# Altium PCB lora1280m.PcbDoc
Units mm, origin at the board's own origin, x right, y up, seen from the top; angles counter-clockwise.
Board outline 50 x 57 mm, 2 copper layers (Top Layer, Bottom Layer); 15 components, 18 nets, 64 pads, 72 vias.
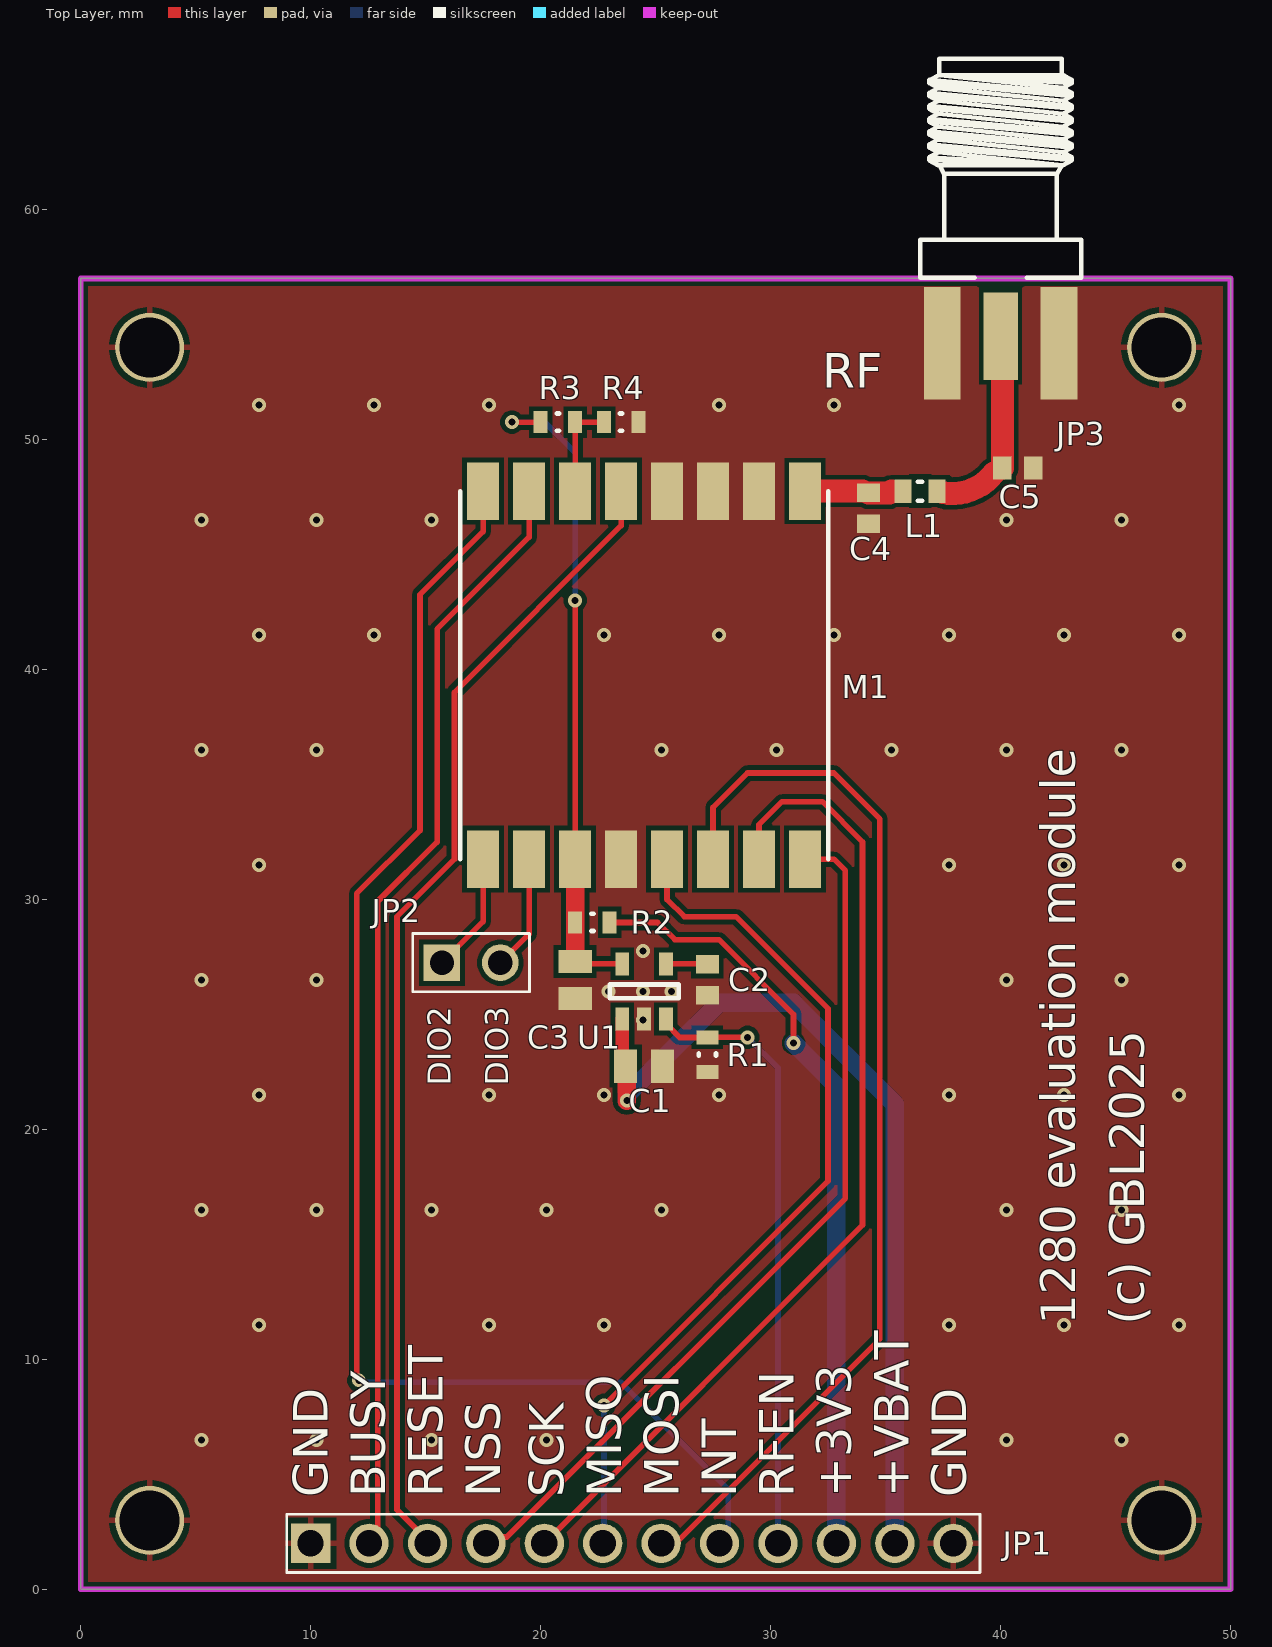
[diagram p0: Top Layer view]
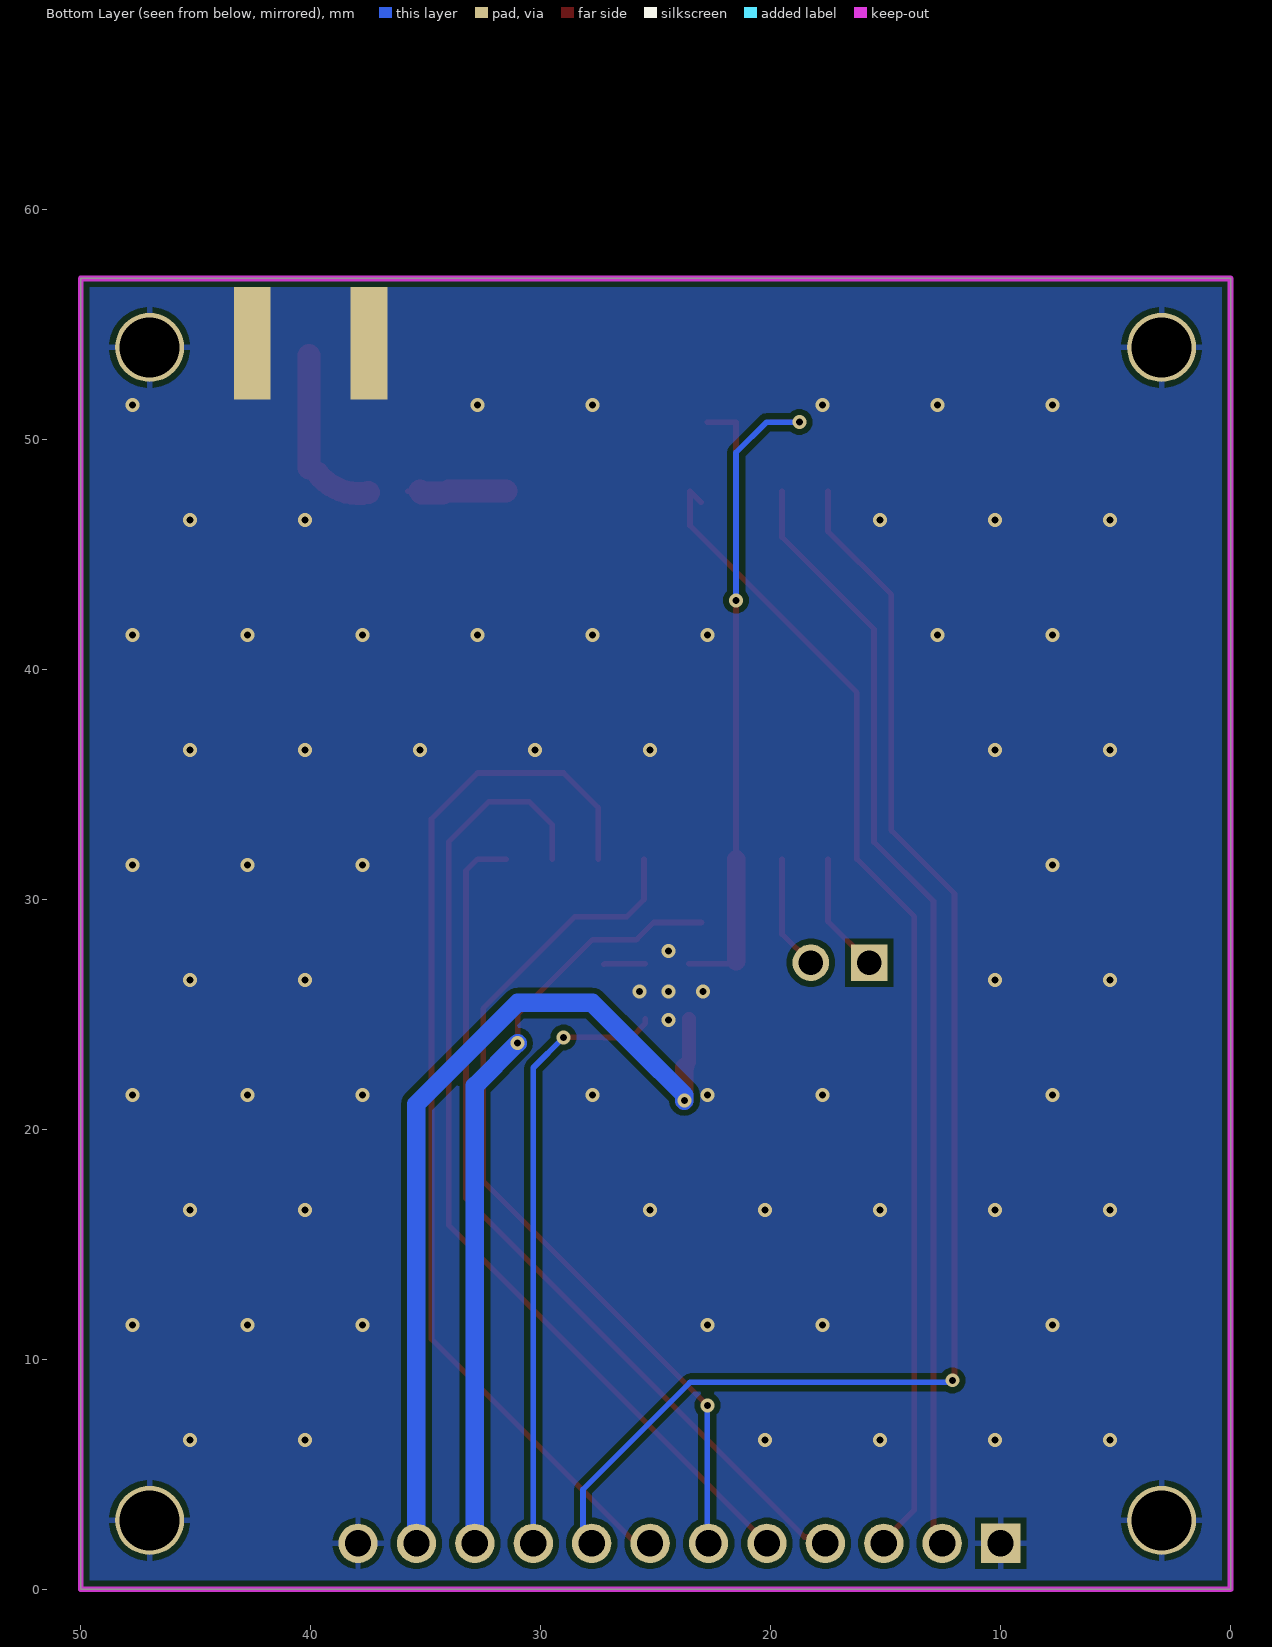
[diagram p1: Bottom Layer view, seen from below]
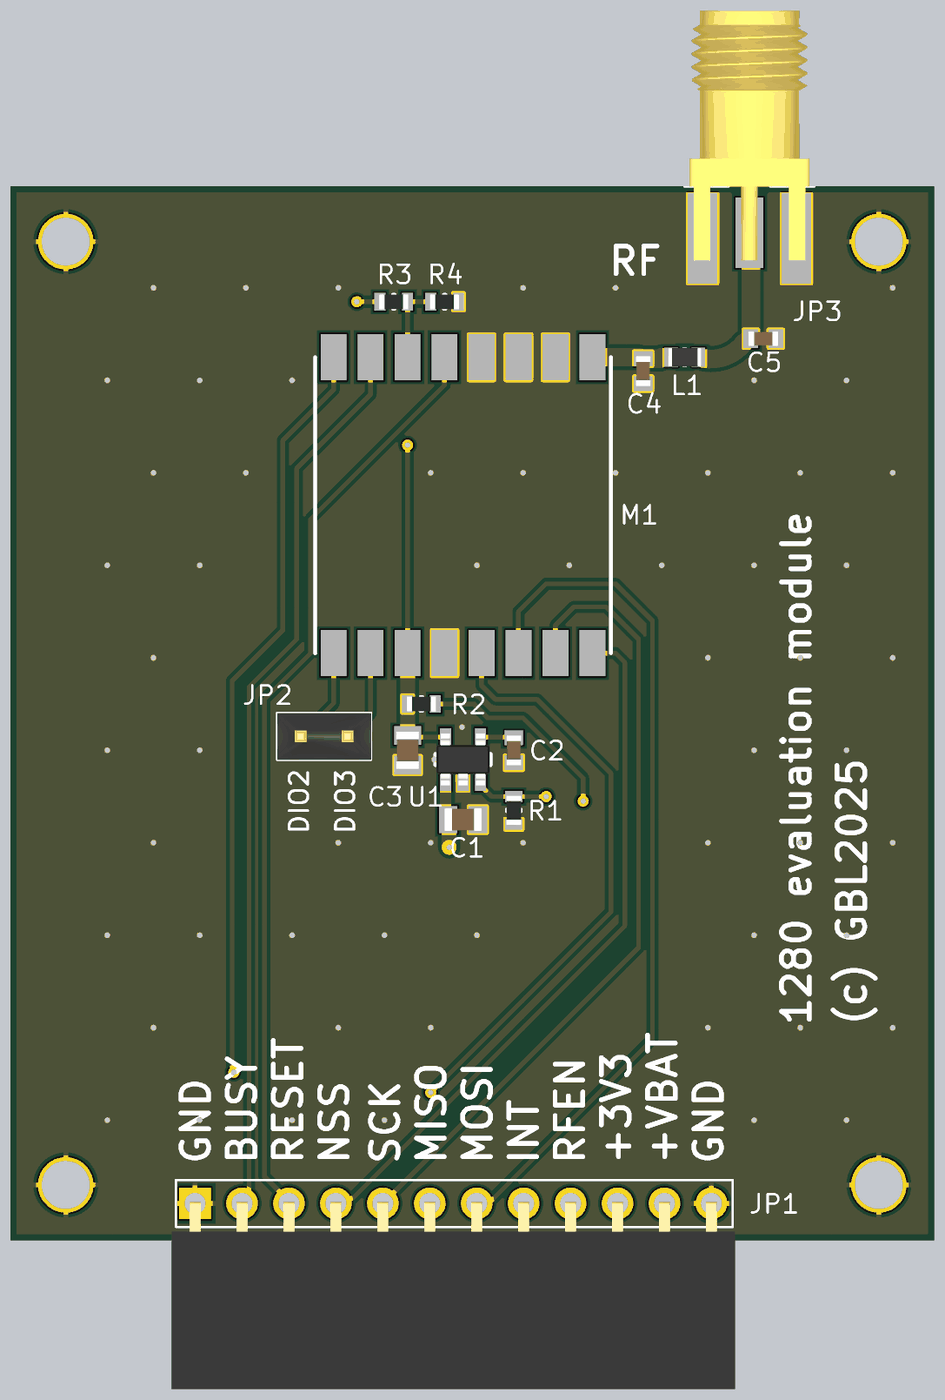
[diagram p2: 3D render of the assembled board from above, using the file's embedded part models]

## Layer stack, top to bottom
Top Solder: solder mask 0.0102, Solder Resist, Dk 3.5
Top Layer: signal copper 0.0356
Dielectric 1: dielectric 0.32, FR-4, Dk 4.8
Bottom Layer: signal copper 0.0356
Bottom Solder: solder mask 0.0102, Solder Resist, Dk 3.5

## Board outline
0,0 50,0 50,57 0,57

## Design rules (kind name [scope] priority, off if disabled: settings)
Clearance [All] p1: gap=0.2 ignorepadtopadclearanceinfootprint=FALSE
HoleSize [All] p1: absolutevalues=TRUE maxlimit=5 minlimit=0.025 maxpercent=80.000 minpercent=20.000
MinimumSolderMaskSliver [All] p1: minsoldermaskwidth=0.1
PolygonConnect PolygonConnect_1 [All vs IsNamedPolygon('GND_L01_P001') Or IsNamedPolygon('GND_L02_P000')] p1: thpad.connectstyle=Relief thpad.reliefconductorwidth=0.254 thpad.reliefentries=4 thpad.polygonreliefangle="90 Angle" thpad.airgapwidth=0.254 smdpad.connectstyle=Direct smdpad.reliefconductorwidth=0.254 smdpad.reliefentries=4 smdpad.polygonreliefangle="90 Angle" smdpad.airgapwidth=0.254 via.connectstyle=Direct via.reliefconductorwidth=0.254 via.reliefentries=4 via.polygonreliefangle="90 Angle" via.airgapwidth=0.254
PolygonConnect [All] p2: connectstyle=Relief reliefconductorwidth=0.254 reliefentries=4 polygonreliefangle="90 Angle" airgapwidth=0.254
RoutingVias [All] p1: holewidth=0.711 width=1.27 viastyle="Through Hole" minholewidth=0.711 minwidth=1.27 maxholewidth=0.711 maxwidth=1.27
SilkToSilkClearance [All] p1: silktosilkclearance=0.1
SilkToSolderMaskClearance [IsPad] p1: minsilkscreentomaskgap=0.1 clearancetoexposedcopper=TRUE
SolderMaskExpansion [All] p1: expansion=0.102 istentingtop=FALSE
Width [All] p1: maxlimit=2 minlimit=0.2 preferedwidth=0.25
26 further rules are at their usual default settings.

## Components (designator, comment, footprint, x,y, rotation, side; value= is the part's Value field where it differs from the comment)
C1 "CAPN" C-0805 24.5,22.75 r0 top
C2 "CAPN" C-0603 27.25,26.5 r270 top
C3 "CAPN" C-0805 21.5,26.5 r270 top
C4 "CAPN" C-0603 34.25,47 r270 top
C5 "CAPN" C-0603 40.75,48.75 r0 top
JP1 "CON12" PBS1-12R 10,2 r0 top locked
JP2 "HEADER 2" PLS1-2 15.71,27.25 r0 top
JP3 "EM-SA071-GGT" SMA_F_EDGE 40,55.75 r270 top
L1 "L" L-0603 36.5,47.75 r0 top
M1 "LORA1280" LGA16_LORA1280 24.5,39.75 r90 top
R1 "RES" R-0603 27.25,23.25 r90 top
R2 "RES" R-0603 22.25,29 r0 top
R3 "RES" R-0603 20.75,50.75 r0 top
R4 "RES" R-0603 23.5,50.75 r180 top
U1 "LP5907MFX-3.0" SOT-23-5 24.5,26 r90 top

## Footprints (in the part's own frame and the unit in brackets; to place one, negate y for a bottom-side part, rotate by r counter-clockwise, add the part's x,y. Pads: shape width x height; smd on the part's side, far side on the other; paste and mask are expansions set on the pad)
C-0603 [mm] "Chip Capacitor, 2-Leads, Body 1,60x0,80mm, IPC Medium Density"
  rect 0.8x1 smd: 1(-0.675,0) 2(0.675,0)
  body extent -0.8,-0.4 0.8,0.4, height 0.8
C-0805 [mm] "Chip Capacitor, 2-Leads, Body 2,00x1,25mm, IPC Medium Density"
  rect 1x1.45 smd: 1(-0.8,0) 2(0.8,0)
  body extent -1,-0.62 1,0.63, height 1.25
L-0603 [mm] "Chip Inductor, 2-Leads, Body 1,60x0,80mm, IPC Medium Density"
  rect 0.74x1.02 smd: 1(-0.735,0) 2(0.735,0)
  silkscreen extent -0.1,-0.41 0.1,0.41, body extent -0.9,-0.5 0.9,0.5, height 1
LGA16_LORA1280 [mm]
  rect 2.5x1.4 smd: 1(-8,7) 2(-8,5) 3(-8,3) 4(-8,1) 5(-8,-1) 6(-8,-3) 7(-8,-5) 8(-8,-7) 9(8,-7) 10(8,-5) 11(8,-3) 12(8,-1) 13(8,1) 14(8,3) 15(8,5) 16(8,7)
  silkscreen extent -8,-8 8,8, body extent -7.5,-7.51 7.5,7.51, height 1.5
PBS1-12R [mm] "Header, Vertical, 2.54 mm pitch; 0.70 mm lead width, 10 pins, 1 row, 10 pins per row, 24.13 mm L X 2.54 mm W X 7.54 mm H body"
  rect 1.71x1.71 hole 1.14 paste-1.71: 1(0,0)
  round 1.71 hole 1.14 paste-1.71: 2(2.54,0) 3(5.08,0) 4(7.62,0) 5(10.16,0) 6(12.7,0) 7(15.24,0) 8(17.78,0) 9(20.32,0) 10(22.86,0) 11(25.4,0) 12(27.94,0)
  silkscreen extent -1.04,-1.27 29.1,1.27, body extent -1.27,-10.03 29.21,0.1, height 2.54
PLS1-2 [mm] "Header, Vertical, 2.54 mm pitch; 0.64 mm lead width, 2 pins, 1 row, 2 pins per row, 5.08 mm L X 2.54 mm W X 8.54 mm H body"
  rect 1.59x1.59 hole 1.06 paste-1.59: 1(0,0)
  round 1.59 hole 1.06 paste-1.59: 2(2.54,0)
  silkscreen extent -1.27,-1.27 3.81,1.27, body extent -1.27,-1.27 3.81,1.27, height 8.54
R-0603 [mm] "Chip Resistor, 2-Leads, Body 1,60x0,82mm, IPC Medium Density"
  rect 0.6x0.95 smd: 1(-0.75,0) 2(0.75,0)
  silkscreen extent -0.05,-0.38 0.05,0.38, body extent -0.8,-0.4 0.8,0.4, height 0.45
SMA_F_EDGE [mm] "SMA End Launch Jack for 1.58mm PCB, 50 Ohm, Flat Tab Contact"
  rect 3.81x1.5 smd: 1(1.27,0)
  rect 4.9x1.6 smd: 2(1.575,2.54) 2(1.575,-2.54)
  rect 4.9x1.6 smd far side: 2(1.575,2.54) 2(1.575,-2.54)
  silkscreen extent -10.81,-3.5 -1.28,3.5, body extent -10.73,-3.25 2.77,3.25, height 3.7
SOT-23-5 [mm] "SOT23, 5-Leads, Body 2,90x2,45mm, Pitch 0,95mm, IPC Medium Density"
  rect 1x0.6 smd: 1(-1.2,0.95) 2(-1.2,0) 3(-1.2,-0.95) 4(1.2,-0.95) 5(1.2,0.95)
  silkscreen extent -0.3,-1.5 0.3,1.5, body extent -1.4,-1.45 1.4,1.45, height 1.55

## Part data
C1 C2 C3 C4 C5: Voltage=50V, Вид=Конденсатор, Точність/група=NP0
JP1: "Connector", Вид=Роз'єм
JP3: library part SMA, "SMA Female R/A PCB Mount", Вид=Роз'єм
U1: library part LP5907, "250mA Low-Dropout Regulator", Вид=Мікросхема
JP2: Вид=Роз'єм
L1: Вид=Індуктивність
R1 R2 R3 R4: Вид=Резистор, Точність/група=5%

## Free pads (board coordinates)
  round 3 hole 2.6: 1(3,3) 1(3,54) 1(47,3) 1(47,54)

## Via types
v1: diameter 0.6, hole 0.3, Top Layer to Bottom Layer, tented both sides, 65 vias
v2: diameter 0.6, hole 0.3, Top Layer to Bottom Layer, 7 vias

## Nets (pads, with @x,y where several pads share a name; then routed paths per layer and width w, separated by ;. In a path a pad name is that pad's centre, name@x,y a point inside that pad or via, vN(x,y) a via of type N, cw(c..) or ccw(c..) an arc to the next point about the centre after c; other vN are vias at no path point)
GND: C1.2 C2.2 C3.2 C4.2 C5.2 JP1.1 JP1.12 JP3.2 M1.4 M1.10 M1.11 M1.12 pad.1 R1.1 R4.1 U1.2
  other v1: 5.25,6.5 10.25,6.5 15.25,6.5 20.25,6.5 40.25,6.5 45.25,6.5 7.75,11.5 17.75,11.5 22.75,11.5 37.75,11.5 42.75,11.5 47.75,11.5 5.25,16.5 10.25,16.5 15.25,16.5 20.25,16.5 25.25,16.5 40.25,16.5 45.25,16.5 7.75,21.5 17.75,21.5 22.75,21.5 27.75,21.5 37.75,21.5 42.75,21.5 47.75,21.5 24.446,24.75 22.946,26 24.446,26 25.696,26 5.25,26.5 10.25,26.5 40.25,26.5 45.25,26.5 24.446,27.75 7.75,31.5 37.75,31.5 42.75,31.5 47.75,31.5 5.25,36.5 10.25,36.5 25.25,36.5 30.25,36.5 35.25,36.5 40.25,36.5 45.25,36.5 7.75,41.5 12.75,41.5 22.75,41.5 27.75,41.5 32.75,41.5 37.75,41.5 42.75,41.5 47.75,41.5 5.25,46.5 10.25,46.5 15.25,46.5 40.25,46.5 45.25,46.5 7.75,51.5 12.75,51.5 17.75,51.5 27.75,51.5 32.75,51.5 47.75,51.5
MISO: JP1.6 M1.5 | length 38
  Top Layer w0.25: v2(22.75,8) 32.5,17.75 32.5,25.25 28.5,29.25 26.25,29.25 25.5,30 M1.5
  Bottom Layer w0.25: JP1.6 22.75,2.05 v2(22.75,8)
MOSI: JP1.7 M1.6 | length 46.5
  Top Layer w0.25: JP1.7@25.62,1.75 34.75,10.88 34.75,33.5 32.75,35.5 29,35.5 27.5,34 M1.6
NetC2_1: C2.1 U1.4 | length 1.8
  Top Layer w0.25: U1.4 27.225,27.2 C2.1
NetC3_1: C3.1 M1.3 R2.1 R3.1 U1.5 | length 28.8
  Top Layer w0.25: v2(18.75,50.75) R3.1 ; C3.1@21.45,27.25 C3.1 21.6,27.2 U1.5 ; M1.3 v2(21.5,43)
  Top Layer w0.8: C3.1 R2.1 M1.3
  Bottom Layer w0.25: v2(18.75,50.75) 20.183,50.75 21.5,49.433 v2(21.5,43)
NetC4_1: C4.1 L1.1 M1.9 | length 4
  Top Layer w0.25: 35.25,47.75 L1.1
  Top Layer w1: M1.9 C4.1@34,47.75 ; C4.1 35.175,47.675 35.25,47.75
NetC5_1: C5.1 JP3.1 L1.2 | length 7.5
  Top Layer w0.25: JP3.1@40,53.73 JP3.1@40.075,53.655
  Top Layer w1: L1.2@37.488,47.687 ccw(c37.905,49.92) C5.1@39.705,48.535 ; C5.1 JP3.1@40.075,53.655
NetJP2_1: JP2.1 M1.1 | length 5.2
  Top Layer w0.25: JP2.1 17.5,29.04 M1.1
NetJP2_2: JP2.2 M1.2 | length 5
  Top Layer w0.25: JP2.2 19.5,28.5 M1.2
NetM1_14: M1.14 R3.2 R4.2 | length 4.3
  Top Layer w0.25: M1.14 R3.2 R4.2
RF_BUSY: JP1.2 M1.15 | length 48.7
  Top Layer w0.25: JP1.2@12.92,1.75 12.92,29.92 15.5,32.5 15.5,41.75 19.5,45.75 M1.15
RF_CS: JP1.4 M1.8 | length 37.9
  Top Layer w0.25: JP1.4@18,1.75 18,1.986 18.293,2.279 18.529,2.279 33.25,17 33.25,31.25 32.75,31.75 M1.8
RF_EN: JP1.9 R1.2 U1.3 | length 26.5
  Top Layer w0.25: U1.3 25.45,24.6 26.05,24 R1.2 v2(29,24)
  Bottom Layer w0.25: v2(29,24) 30.32,22.68 JP1.9
RF_INT: JP1.8 M1.16 | length 61.7
  Top Layer w0.25: v2@12,9 12,30.25 14.75,33 14.75,43.25 17.5,46 M1.16
  Bottom Layer w0.25: v2@12,9 23.5,9 28.16,4.34 JP1.8@28.16,1.75
  other v2: 12.096,9.088
RF_RST: JP1.3 M1.13 | length 51.4
  Top Layer w0.25: JP1.3@15.46,1.75 13.75,3.46 13.75,29.25 16.25,31.75 16.25,39 23.5,46.25 M1.13 M1.13@23.021,47.271
SCK: JP1.5 M1.7 | length 43.4
  Top Layer w0.25: JP1.5 34,15.84 34,32.5 32.25,34.25 30.5,34.25 29.5,33.25 M1.7
V_BATT: C1.1 JP1.11 U1.1 | length 38.3
  Top Layer w0.25: C1.1@23.55,22.9 C1.1
  Top Layer w0.6: C1.1@23.55,22.9 U1.1
  Top Layer w0.8: C1.1 23.75,22.7 v2(23.75,21.25)
  Bottom Layer w0.25: 25.787,23.287 25.787,23.529
  Bottom Layer w0.8: v2(23.75,21.25) 23.75,21.492 25.787,23.529 27.758,25.5 31,25.5 35.4,21.1 JP1.11
VCC: JP1.10 R2.2 | length 33.4
  Top Layer w0.25: R2.2 25.087,29 25.837,28.25 27.75,28.25 31,25 v2(31,23.75)
  Bottom Layer w0.8: v2(31,23.75) 32.86,21.89 JP1.10

## Polygon pours and split planes (outlines as drawn)
GND on Bottom Layer "GND_L02_P000" (solid, remove dead copper, pour order 0): 0,0 50,0 50,57 0,57
GND on Top Layer "GND_L01_P001" (solid, remove dead copper, pour order 1): 0,0 50,0 50,57 0,57

## Keep-outs
Keep-Out Layer:
  the board outline again, w0.25

## Other copper
Top Layer:
  pour cut-out: 36,48.5 36,47 37,47 37,48.5

## Silkscreen, mask and mechanical layers (free items; w line width, h text height)
Top Overlay:
  text "RF" at 32.254,52.254 h1.5
  text "DIO2" at 16.1,21.9 h1 r90
  text "DIO3" at 18.6,21.9 h1 r90
  text "1280 evaluation module" at 43.246,11.504 h1.5 r90
  text "(c) GBL2025" at 46.246,11.504 h1.5 r90
  text "GND" at 10.746,4.004 h1.5 r90
  text "BUSY" at 13.246,4.004 h1.5 r90
  text "RESET" at 15.746,4.004 h1.5 r90
  text "NSS" at 18.246,4.004 h1.5 r90
  text "SCK" at 20.996,4.004 h1.5 r90
  text "MISO" at 23.496,4.004 h1.5 r90
  text "MOSI" at 25.996,4.004 h1.5 r90
  text "INT" at 28.496,4.004 h1.5 r90
  text "RFEN" at 30.996,4.004 h1.5 r90
  text "+3V3" at 33.496,4.004 h1.5 r90
  text "+VBAT" at 35.996,4.004 h1.5 r90
  text "GND" at 38.496,4.004 h1.5 r90